# Altium PCB charging_pcb.PcbDoc
Units mil, origin at the board's own origin, x right, y up, seen from the top; angles counter-clockwise.
Board outline 1825 x 2225 mil, 2 copper layers (Top Layer, Bottom Layer); 13 components, 11 nets, 52 pads, 0 vias.
Unrouted connection lines stored in the file: 38.
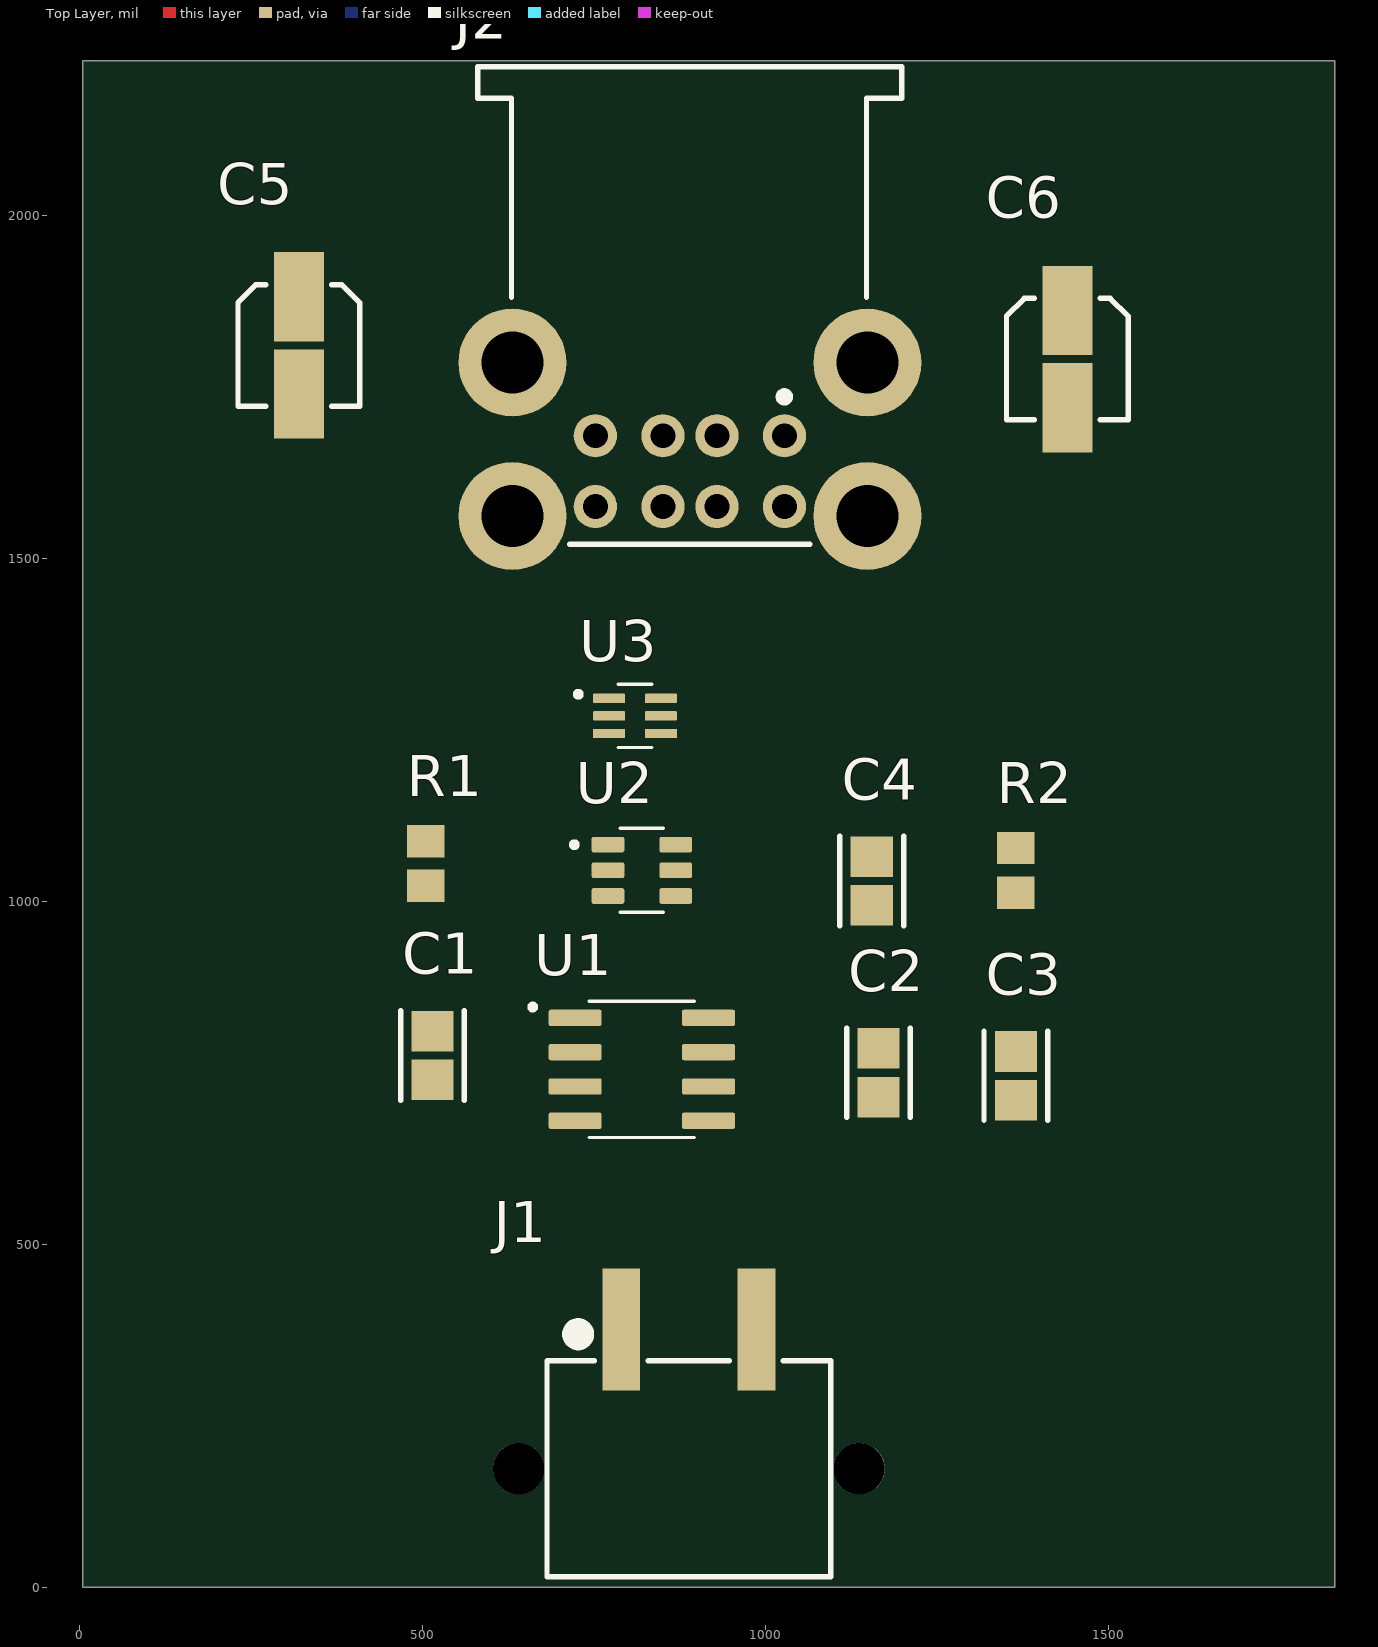
[diagram p0: Top Layer view]
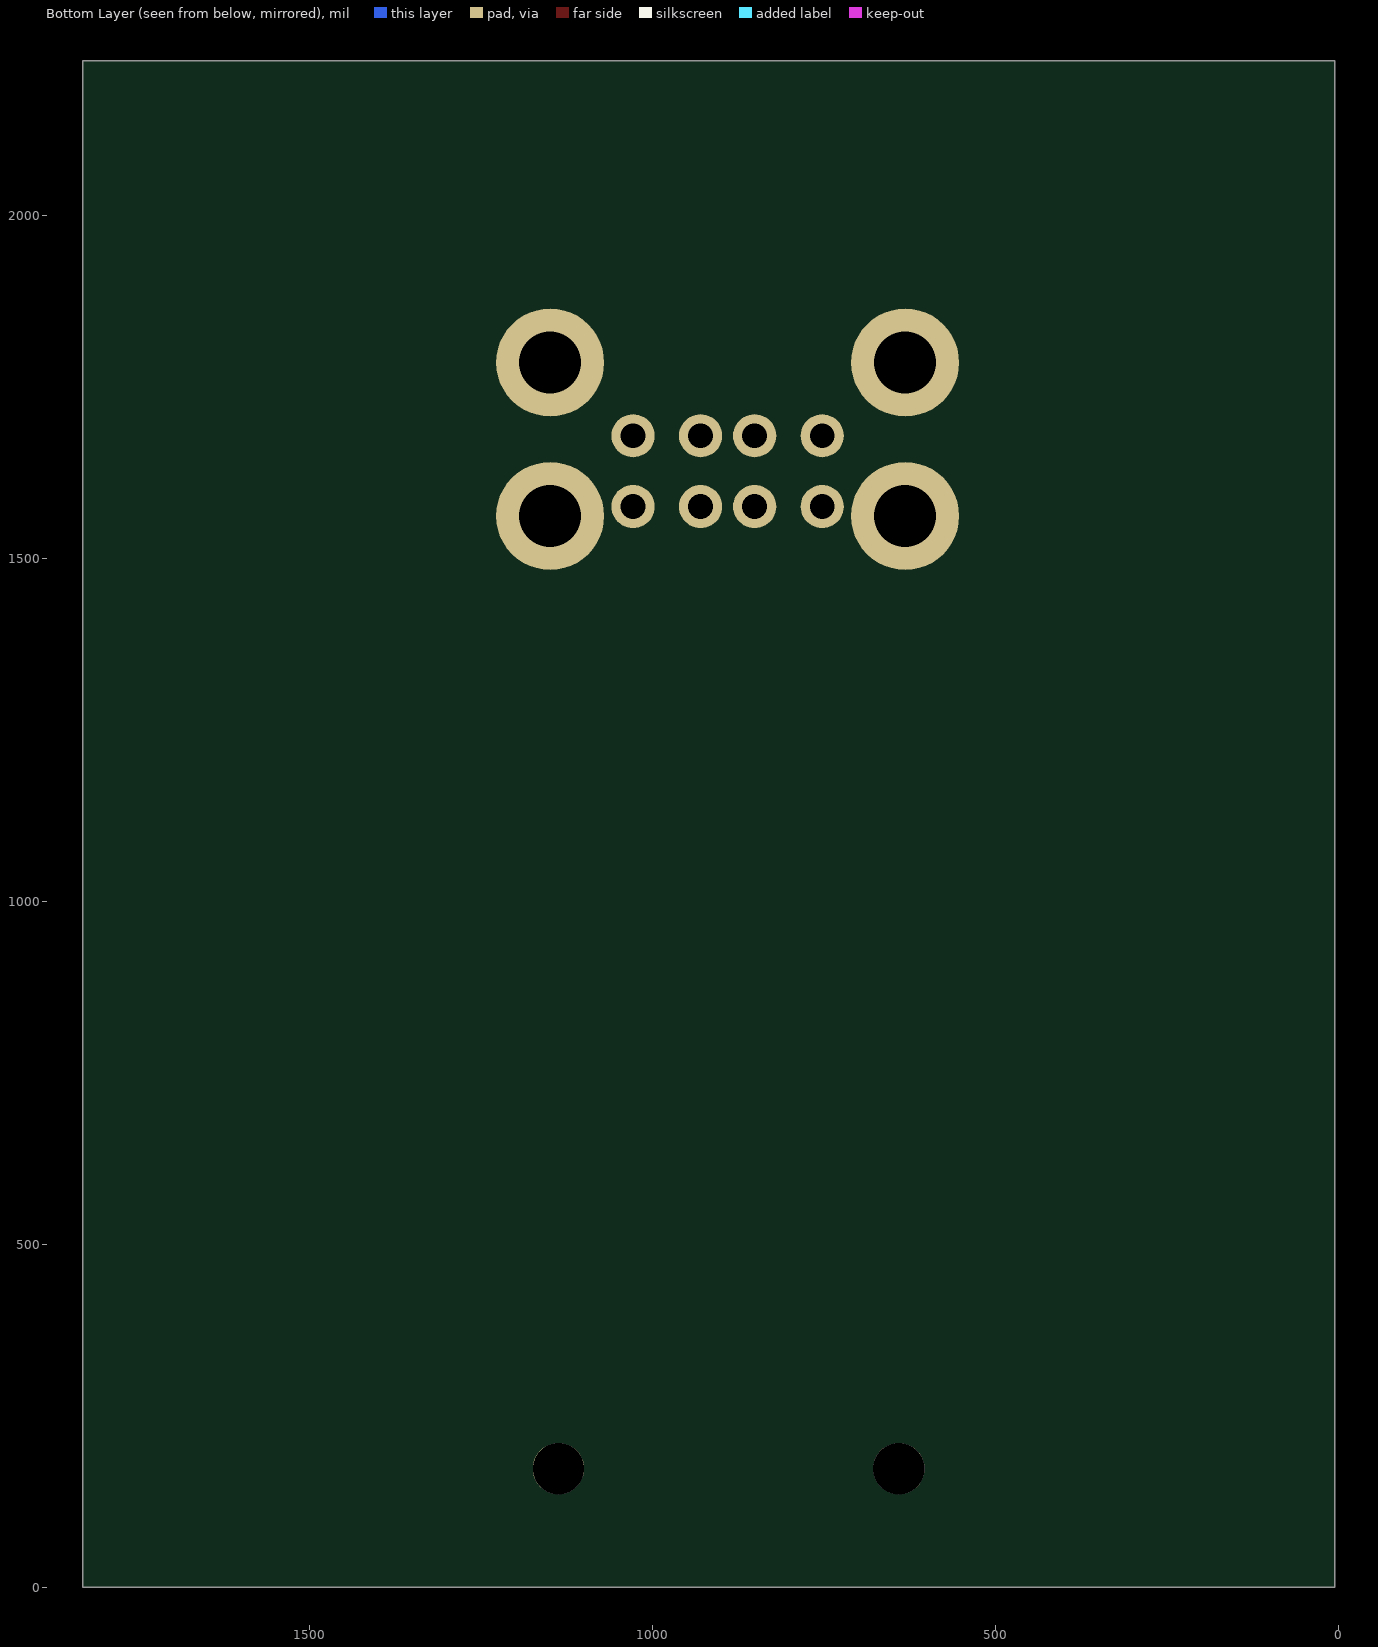
[diagram p1: Bottom Layer view, seen from below]

## Layer stack, top to bottom
Top Solder: solder mask 0.4, Solder Resist, Dk 3.5
Top Layer: signal copper 1.4
Dielectric 1: dielectric 12.6, FR-4, Dk 4.8
Bottom Layer: signal copper 1.4
Bottom Solder: solder mask 0.4, Solder Resist, Dk 3.5

## Board outline
5,0 1830,0 1830,2225 5,2225

## Design rules (kind name [scope] priority, off if disabled: settings)
Clearance [All] p1: gap=10 ignorepadtopadclearanceinfootprint=FALSE except(0: Arc-Hole Track-Hole SMDPad-Hole THPad-Hole Via-Hole Fill-Hole Poly-Hole Region-Hole Text-Hole)
PolygonConnect [All] p1: connectstyle=Relief reliefconductorwidth=10 reliefentries=4 polygonreliefangle="90 Angle" airgapwidth=10
RoutingVias [All] p1: holewidth=28 width=50 viastyle="Through Hole" minholewidth=28 minwidth=50 maxholewidth=28 maxwidth=50
SolderMaskExpansion [All] p1: expansion=4 istentingtop=FALSE
Width [All] p1: maxlimit=10 minlimit=10 preferedwidth=10
30 further rules are at their usual default settings.

## Classes and differential pairs
component class Charging_sch: C1 C2 C3 C4 C5 J1 J2 R1 R2 U1 U2 U3

## Components (designator, comment, footprint, x,y, rotation, side; value= is the part's Value field where it differs from the comment)
C1 "0.1uF 16V 10%" C0805C104K8RAC7800 505,775 r90 top
C2 "0.1uF 16V 10%" C0805C104K8RAC7800 1155,750 r90 top
C3 "0.1uF 16V 10%" C0805C104K8RAC7800 1355,745.46 r90 top
C4 "0.1uF 16V 10%" C0805C104K8RAC7800 1145,1029.54 r90 top
C5 "22uF" RVT1C220M0405 320,1810 r270 top
C6 "22uF" RVT1C220M0405 1440,1790 r270 top
J1 "Terminal Block" "Terminal Block" 885,180 r0 top
J2 "USB1035" USB1035 890,1785 r180 top
R1 "100K" ARG05FTC1003 505,1055 r90 top
R2 "100K" ARG05FTC1003 1365,1045 r270 top
U1 "TPS2066DR" TPS2066DR 820,760 r0 top
U2 "TPS2513DBVR" TPS2513DBVR 820,1050 r0 top
U3 "TPD4E1U06DCKR" TPD4E1U06DCKR 810,1270 r0 top

## Footprints (in the part's own frame and the unit in brackets; to place one, negate y for a bottom-side part, rotate by r counter-clockwise, add the part's x,y. Pads: shape width x height; smd on the part's side, far side on the other; paste and mask are expansions set on the pad)
ARG05FTC1003 [mm] "Chip Resistor, 2-Leads, Body 2.00x1.23mm, IPC Medium Density"
  rect 1.2x1.4 smd: 1(-0.825,0) 2(0.825,0)
  body extent -1.07,-0.7 1.07,0.7, height 0.6
C0805C104K8RAC7800 [mil]
  rect 59.24x61.27 smd paste+0 mask+0: 1(-35.46,-10) 2(35.46,-10)
  silkscreen extent -65,-56 65,36, body extent -85,-60 85,40, height 10
RVT1C220M0405 [mm]
  rect 3.3x1.85 smd: 1(-1.8,0) 2(1.8,0)
  silkscreen extent -2.25,-2.25 2.25,2.25, body extent -2.5,-2.25 2.5,2.25, height 5.8
"Terminal Block" [mm]
  rect 1.4x4.5 smd: 1(-2.411,4.973) 2(2.589,4.973)
  round 1.9 hole 1.9 unplated: M1(-6.211,-0.177) M2(6.389,-0.177)
  silkscreen extent -5.16,-4.18 5.34,4.99, body extent -6.91,-4.18 7.09,6.82, height 9.95
TPD4E1U06DCKR [mm]
  rrect25% 1.19x0.35 smd: 1(-0.96,0.65) 2(-0.96,0) 3(-0.96,-0.65) 4(0.96,-0.65) 5(0.96,0) 6(0.96,0.65)
  silkscreen extent -2.2,-1.17 0.63,1.17, body extent -1.05,-1 1.05,1, height 1.1
TPS2066DR [mm]
  rrect25% 1.97x0.6 smd: 1(-2.47,1.778) 2(-2.47,0.508) 3(-2.47,-0.762) 4(-2.47,-2.032) 5(2.47,-2.032) 6(2.47,-0.762) 7(2.47,0.508) 8(2.47,1.778)
  silkscreen extent -4.14,-2.65 1.95,2.4, body extent -3,-2.58 3,2.32, height 1.75
TPS2513DBVR [mm]
  rrect25% 1.21x0.58 smd: 1(-1.255,0.823) 2(-1.255,-0.127) 3(-1.255,-1.077) 4(1.255,-1.077) 5(1.255,-0.127) 6(1.255,0.823)
  silkscreen extent -2.6,-1.69 0.8,1.43, body extent -1.4,-1.58 1.4,1.32, height 1.45
USB1035 [mm]
  round 1.6 hole 0.92: 1A(-3.5,5.33) 1B(-3.5,2.71) 2A(-1,5.33) 2B(-1,2.71) 3A(1,5.33) 3B(1,2.71) 4A(3.5,5.33) 4B(3.5,2.71)
  round 4 hole 2.3: 9(-6.57,0) 10(6.57,0) 11(-6.57,5.68) 12(6.57,5.68)
  silkscreen extent -7.85,-10.95 7.85,6.73, body extent -7.86,-11.09 7.86,6.59, height 16.17

## Part data
C1 C2 C3 C4: library part CC0805KRX7R9BB104, "贴片电容（MLCC） 100nF ±10% 50V X7R 0805", Capacitance=100nF, Case Code (Imperial)=0805, Case Code (Metric)=2012, Dielectric=X7R, Insulation Resistance=100GR, Manufacturer=Yageo, Max Operating Temperature=125°C, Min Operating Temperature=-55°C, Package Quantity=1, Supplier Part Number 1=311-1140-2-ND, Tolerance=10%, Voltage=50V, Case/Package=0805, Category="Ceramic Capacitors", ComponentLink1Description=https://datasheet.ciiva.com/11786/0900766b80d84f1d-11786009.pdf?src-supplier=RSComponents, ComponentLink1URL=https://datasheet.ciiva.com/11786/0900766b80d84f1d-11786009.pdf?src-supplier=RSComponents, ComponentLink2Description=https://datasheet.ciiva.com/28450/1489800-28450805.pdf?src-supplier=Element14, ComponentLink2URL=https://datasheet.ciiva.com/28450/1489800-28450805.pdf?src-supplier=Element14, ComponentLink3Description=https://datasheet.ciiva.com/46393/1734573-46393307.pdf?src-supplier=Element14, ComponentLink3URL=https://datasheet.ciiva.com/46393/1734573-46393307.pdf?src-supplier=Element14, ComponentLink4Description=https://datasheet.ciiva.com/155/mlccorderingcode-155930.pdf?src-supplier=Digi-Key, ComponentLink4URL=https://datasheet.ciiva.com/155/mlccorderingcode-155930.pdf?src-supplier=Digi-Key, ComponentLink5Description=https://datasheet.ciiva.com/155/mlccorderingcode-155929.pdf?src-supplier=Digi-Key, ComponentLink5URL=https://datasheet.ciiva.com/155/mlccorderingcode-155929.pdf?src-supplier=Digi-Key, ComponentLink6Description=https://datasheet.ciiva.com/155/mlccorderingcode-155931.pdf?src-supplier=Digi-Key, ComponentLink6URL=https://datasheet.ciiva.com/155/mlccorderingcode-155931.pdf?src-supplier=Digi-Key, ComponentLink7Description=https://datasheet.ciiva.com/11464/upy-gphc-x7r-6-3v-to-50v-8-11464757.pdf?src-supplier=Avnet, ComponentLink7URL=https://datasheet.ciiva.com/11464/upy-gphc-x7r-6-3v-to-50v-8-11464757.pdf?src-supplier=Avnet, ComponentLink8Description=https://datasheet.ciiva.com/16625/upy-gphc-x7r-6-3v-to-50v-8-16625549.pdf?src-supplier=Avnet+Europe, ComponentLink8URL=https://datasheet.ciiva.com/16625/upy-gphc-x7r-6-3v-to-50v-8-16625549.pdf?src-supplier=Avnet+Europe, ComponentLink9Description=https://datasheet.ciiva.com/29242/445210-da-01-en-kerko-chip-0805-x7r-0-1uf-10proz-50vg-29242074.pdf?src-supplier=Conrad, ComponentLink9URL=https://datasheet.ciiva.com/29242/445210-da-01-en-kerko-chip-0805-x7r-0-1uf-10proz-50vg-29242074.pdf?src-supplier=Conrad, Depth=1.25mm, Halogen Free="Halogen Free", Height=0.85mm, Lead Free="Lead Free", Length=2mm, Manufacturer Part Number=CC0805KRX7R9BB104, Material=Ceramic, Mount="Surface Mount", Number of Pins=2, Packaging="Tape and Reel", Pricing 1="4000=0.01864, 8000=0.01734, 12000=0.01647, 28000=0.01560, 100000=0.01181 (USD)", Radiation Hardening=No, REACH SVHC="No SVHC", RoHS=Yes, RoHS Compliant=Yes, Series=CC, Stock 1=10785221, Supplier 1=Digi-Key, Termination=SMD/SMT, Thickness=0.033inch, Voltage Rating=50V, Width=0.049inch
C5 C6: library part RVT1C220M0405, Manufacturer=ROQANG, Capacitance=22uF, Manufacturer Part Number=RVT1C220M0405
J1: library part 691709710302, "Conn Terminal Block F 2 POS 5mm Solder RA SMD 6A T/R", Color=Black, Current=6A, Flammability Rating="UL94 V-0", Manufacturer="Wurth Electronics Midcom", Max Operating Temperature=115°C, Min Operating Temperature=-40°C, Package Quantity=1, Supplier Part Number 1=1297-1108-1-ND, Voltage=300V, Category="Terminal Blocks", ComponentLink1Description=http://www.mouser.com/ds/2/445/6917097103xx-271684.pdf?src-supplier=Mouser, ComponentLink1URL=http://www.mouser.com/ds/2/445/6917097103xx-271684.pdf?src-supplier=Mouser, ComponentLink2Description=http://katalog.we-online.de/em/datasheet/6917097103xx.pdf?src-supplier=Digi-Key, ComponentLink2URL=http://katalog.we-online.de/em/datasheet/6917097103xx.pdf?src-supplier=Digi-Key, ComponentLink3Description=https://katalog.we-online.de/em/datasheet/6917097103xx.pdf?src-supplier=Digi-Key, ComponentLink3URL=https://katalog.we-online.de/em/datasheet/6917097103xx.pdf?src-supplier=Digi-Key, ComponentLink4Description=http://www.farnell.com/cad/1804164.pdf?src-supplier=Element14, ComponentLink4URL=http://www.farnell.com/cad/1804164.pdf?src-supplier=Element14, Connector Type=Screw, Contact Plating=Tin, Current Rating=6A, Housing Material=Nylon, Manufacturer Part Number=691709710302, Mount="Surface Mount", Number of Contacts=2, Number of Levels=1, Number of Positions=2, Number of Positions Per Level=2, Packaging="Tape and Reel", Pitch=0.197inch, Plating=Steel, Pricing 1="1=2.89000, 10=2.56200, 50=2.41200, 100=2.26000 (USD)", REACH SVHC=Unknown, RoHS=Yes, RoHS Compliant=Yes, Stock 1=1256, Supplier 1=Digi-Key, Termination=Screw, Voltage Rating=300V, Wire Gauge (Max)=30AWG, Wire Gauge (Min)=14AWG, Wire/Cable Gauge=30AWG
J2: library part USB1035-GF-P-0-B-B, "USB1035 Series 8 Position Dual Port Through Hole USB", Manufacturer="Global Connector Technology", Supplier Part Number 1=2073-USB1035-GF-P-0-B-B-ND, Category="USB Connectors", Connector Type=USB, Contact Material=Brass, Contact Plating=Gold, Manufacturer Part Number=USB1035-GF-P-0-B-B, Orientation="Right Angle", RoHS=Yes, RoHS Compliant=Yes, Supplier 1=Digi-Key
R1 R2: library part ARG05FTC1003, Manufacturer="Viking Tech", Voltage Rating=100V, Manufacturer Part Number=ARG05FTC1003, Resistance=100K
U1: "Dual 1A, active-high, current-limited, power-distribution switches 8-SOIC -40 to 85", Case/Package=D, Manufacturer="Texas Instruments", Max Input Voltage=5.5V, Max Operating Temperature=85°C, Max Output Current=1A, Min Input Voltage=2.7V, Min Operating Temperature=-40°C, Package Quantity=2500, Supplier Part Number 1=296-28004-1-ND, Category="Hot Swap Controllers", ComponentLink1Description=https://datasheet.ciiva.com/15108/getdatasheetpartid-322117-15108532.pdf?src-supplier=Verical, ComponentLink1URL=https://datasheet.ciiva.com/15108/getdatasheetpartid-322117-15108532.pdf?src-supplier=Verical, ComponentLink2Description=https://datasheet.ciiva.com/1962/tps2061-1962580.pdf?src-supplier=Digi-Key, ComponentLink2URL=https://datasheet.ciiva.com/1962/tps2061-1962580.pdf?src-supplier=Digi-Key, ComponentLink3Description=https://datasheet.ciiva.com/1962/tps2061-1962581.pdf?src-supplier=Digi-Key, ComponentLink3URL=https://datasheet.ciiva.com/1962/tps2061-1962581.pdf?src-supplier=Digi-Key, ComponentLink4Description=https://datasheet.ciiva.com/1962/tps2061-1962582.pdf?src-supplier=Digi-Key, ComponentLink4URL=https://datasheet.ciiva.com/1962/tps2061-1962582.pdf?src-supplier=Digi-Key, Fault Protection="Over Temperature", Interface=On/Off, Lead Free="Lead Free", Manufacturer Part Number=TPS2066DR, Max Supply Voltage=5.5V, Min Supply Voltage=2.7V, Number of Outputs=2, Number of Pins=8, Number of Switches=2, Output Configuration="High Side", Packaging="Tape and Reel", Pricing 1="1=1.61000, 10=1.44400, 25=1.36200, 100=1.16050, 250=1.08968, 500=0.95348, 1000=0.89950 (USD)", Radiation Hardening=No, RoHS=Yes, RoHS Compliant=Yes, Series=-, Stock 1=1325, Supplier 1=Digi-Key, Weight=0.002561oz
U2: "USB Charging Port Controller Dual 5.5V 6-Pin SOT-23 T/R / IC USB PWR SW/CTRLR CHRG SOT23-6", Case/Package=SOT-23-6, Manufacturer="Texas Instruments", Max Input Voltage=5.5V, Max Operating Temperature=125°C, Max Supply Current=200uA, Min Input Voltage=4.5V, Min Operating Temperature=-40°C, Operating Supply Current=155uA, Output Current=35mA, Package Quantity=3000, Supplier Part Number 1=296-37668-1-ND, Category="Power Management ICs", ComponentLink1Description=https://datasheet.ciiva.com/29590/tps2514a-29590179.pdf?src-supplier=Digi-Key, ComponentLink1URL=https://datasheet.ciiva.com/29590/tps2514a-29590179.pdf?src-supplier=Digi-Key, ComponentLink2Description=https://datasheet.ciiva.com/26909/getdatasheetpartid-741816-26909231.pdf?src-supplier=Verical, ComponentLink2URL=https://datasheet.ciiva.com/26909/getdatasheetpartid-741816-26909231.pdf?src-supplier=Verical, Lead Free="Lead Free", Manufacturer Part Number=TPS2513DBVR, Mount="Surface Mount", Number of Outputs=2, Number of Pins=6, Operating Supply Voltage=5.5V, Packaging="Tape and Reel", Pricing 1="1=1.79000, 10=1.60700, 25=1.51600, 100=1.29150, 250=1.21264, 500=1.06106, 1000=1.00100 (USD)", Radiation Hardening=No, RoHS=Yes, RoHS Compliant=Yes, Supplier 1=Digi-Key
U3: "TVS DIODE 5.5VWM 15VC SC70-6", Breakdown Voltage=6.5V, Capacitance=1pF, Case/Package=SC, Clamping Voltage=11V, Manufacturer="Texas Instruments", Max Operating Temperature=125°C, Max Power Dissipation=45W, Max Reverse Leakage Current=10nA, Min Operating Temperature=-40°C, Operating Supply Voltage=5.5V, Package Quantity=3000, Peak Pulse Current=3A, Power Line Protection=Yes, Supplier Part Number 1=296-39347-1-ND, Test Current=1mA, Category="Integrated Circuits (ICs)", ComponentLink1Description=https://datasheet.ciiva.com/12545/tpd4e1u06-224689-12545136.pdf?src-supplier=Mouser, ComponentLink1URL=https://datasheet.ciiva.com/12545/tpd4e1u06-224689-12545136.pdf?src-supplier=Mouser, ComponentLink2Description=https://datasheet.ciiva.com/6574/tpd4e1u06-6574672.pdf?src-supplier=Digi-Key, ComponentLink2URL=https://datasheet.ciiva.com/6574/tpd4e1u06-6574672.pdf?src-supplier=Digi-Key, Direction=Unidirectional, ESD Protection=Yes, Height=1mm, Interface=LVDS,USB,Ethernet, Lead Free="Lead Free", Length=2.15mm, Manufacturer Part Number=TPD4E1U06DCKR, Min Breakdown Voltage=6.5V, Mount="Surface Mount", Number of Bidirectional Channels=4, Number of Channels=4, Number of Pins=6, Packaging="Tape and Reel", Peak Pulse Power=45W, Polarity=Bidirectional, Pricing 1="1=0.49000, 10=0.39900, 100=0.27140, 500=0.20352, 1000=0.15264 (USD)", REACH SVHC="No SVHC", Reverse Standoff Voltage=5.5V, RoHS=Yes, RoHS Compliant=Yes, Series=-, Supplier 1=Digi-Key, Termination=SMD/SMT, Width=1.4mm, Working Voltage=5.5V

## Nets (pads, with @x,y where several pads share a name; then routed paths per layer and width w, separated by ;. In a path a pad name is that pad's centre, name@x,y a point inside that pad or via, vN(x,y) a via of type N, cw(c..) or ccw(c..) an arc to the next point about the centre after c; other vN are vias at no path point)
D1+: J2.3A U2.4 U3.1
D1-: J2.2A U2.6 U3.4
D2+: J2.3B U2.3 U3.6
D2-: J2.2B U2.1 U3.3
GND: C1.2 C2.2 C3.2 C4.2 C5.2 C6.2 J1.2 J2.4A J2.4B U1.1 U2.2 U3.2
NetJ2_9: J2.9 J2.10 J2.11 J2.12
NetR1_2: R1.2 U1.5
NetR2_2: R2.2 U1.8
OUT1: C2.1 C5.1 J2.1A U1.7
OUT2: C3.1 C6.1 J2.1B U1.6
VBUS: C1.1 C4.1 J1.1 R1.1 R2.1 U1.2 U1.3 U1.4 U2.5
pads on no net: J1.M1 J1.M2 U3.5